# Altium PCB lixie.pcbdoc
Units mil, origin at the board's own origin, x right, y up, seen from the top; angles counter-clockwise.
Board outline 3503.15 x 3276.88 mil, 2 copper layers (Top Layer, Bottom Layer); 61 components, 81 nets, 215 pads, 41 vias.
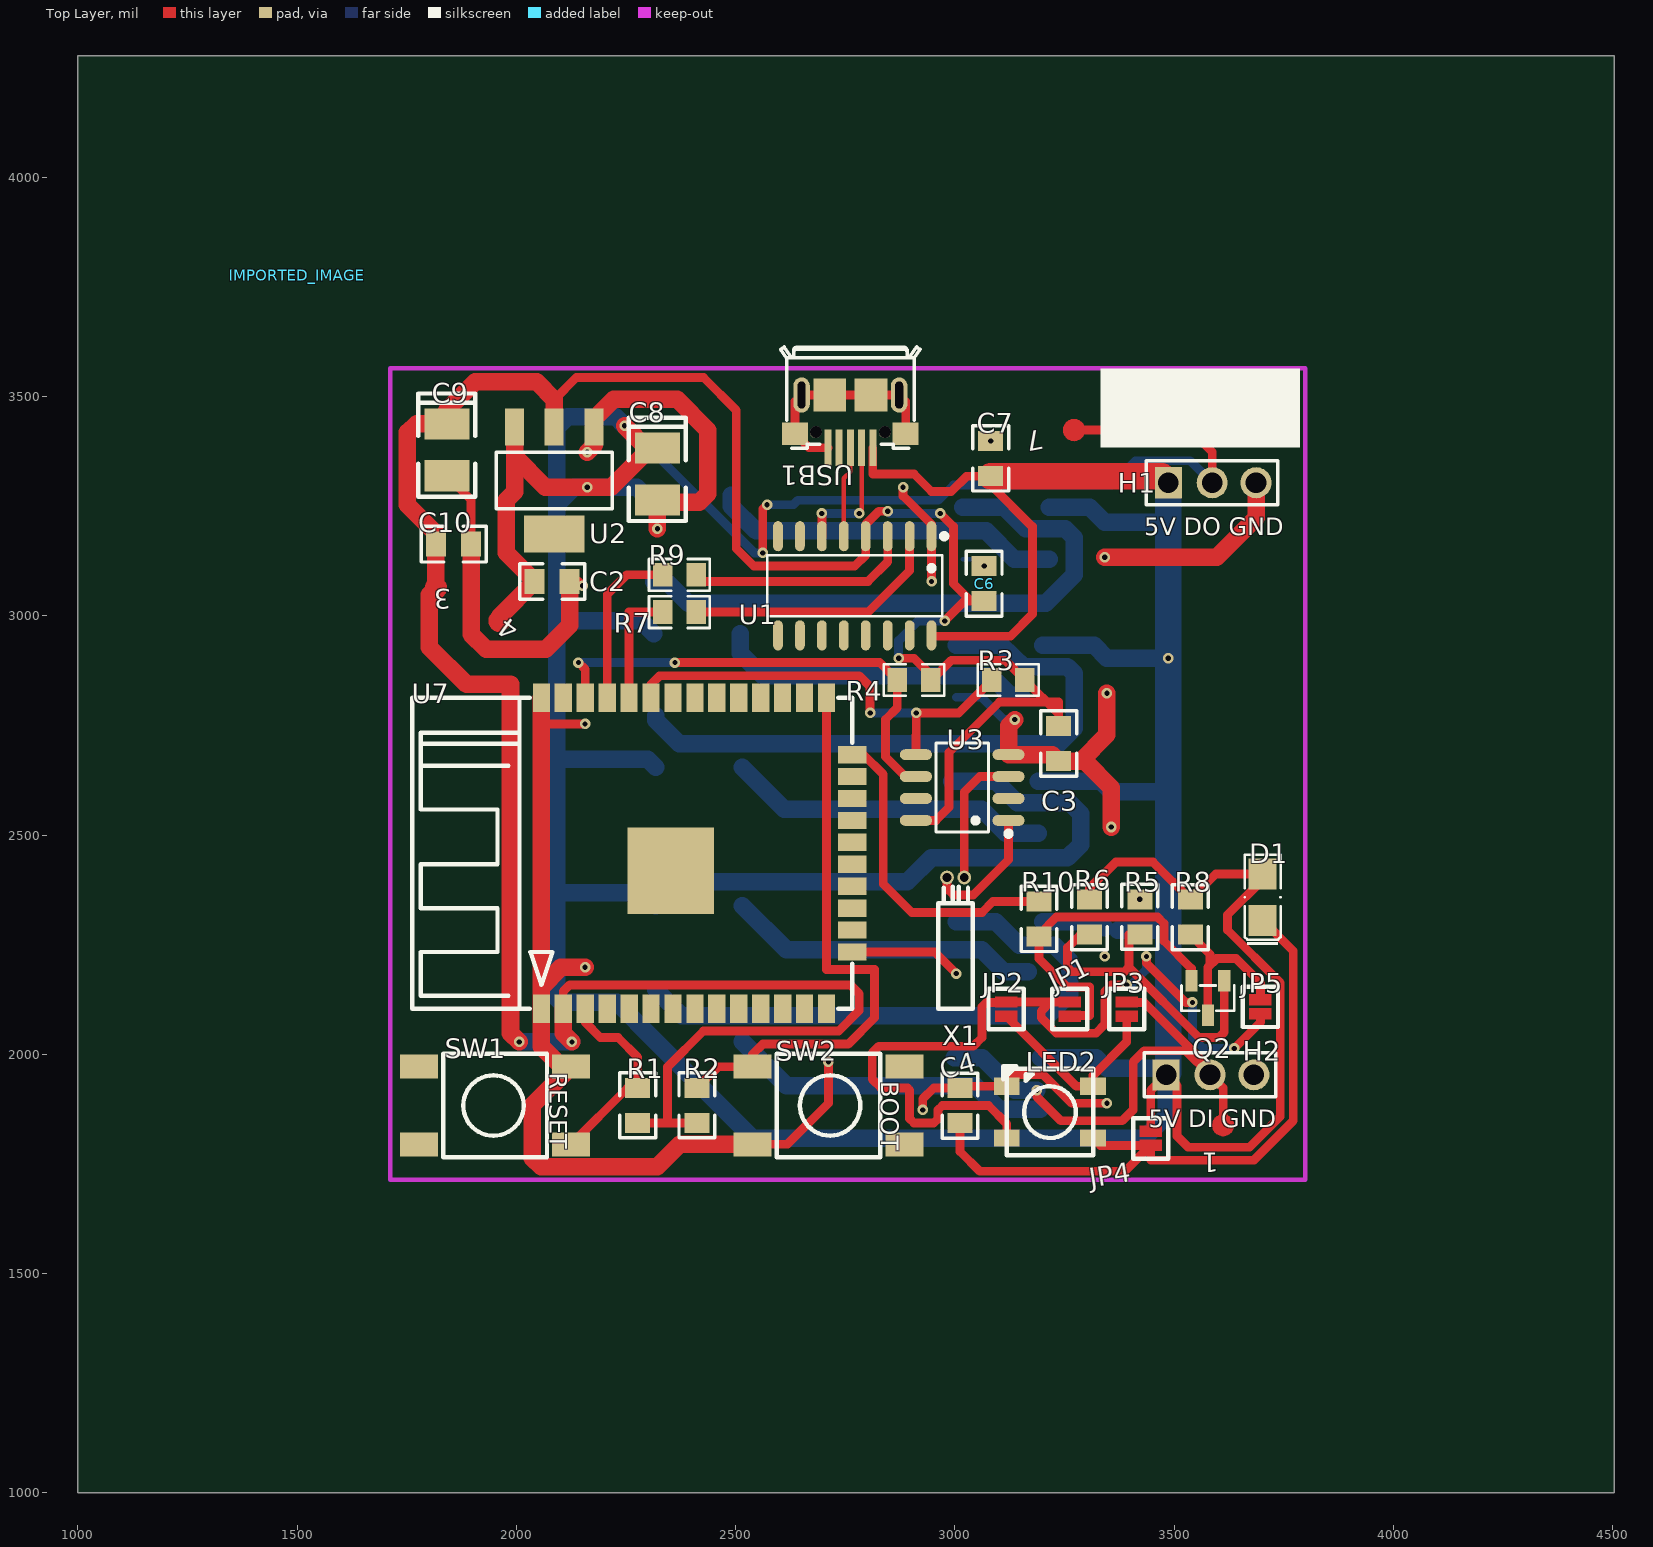
[diagram p0: Top Layer view]
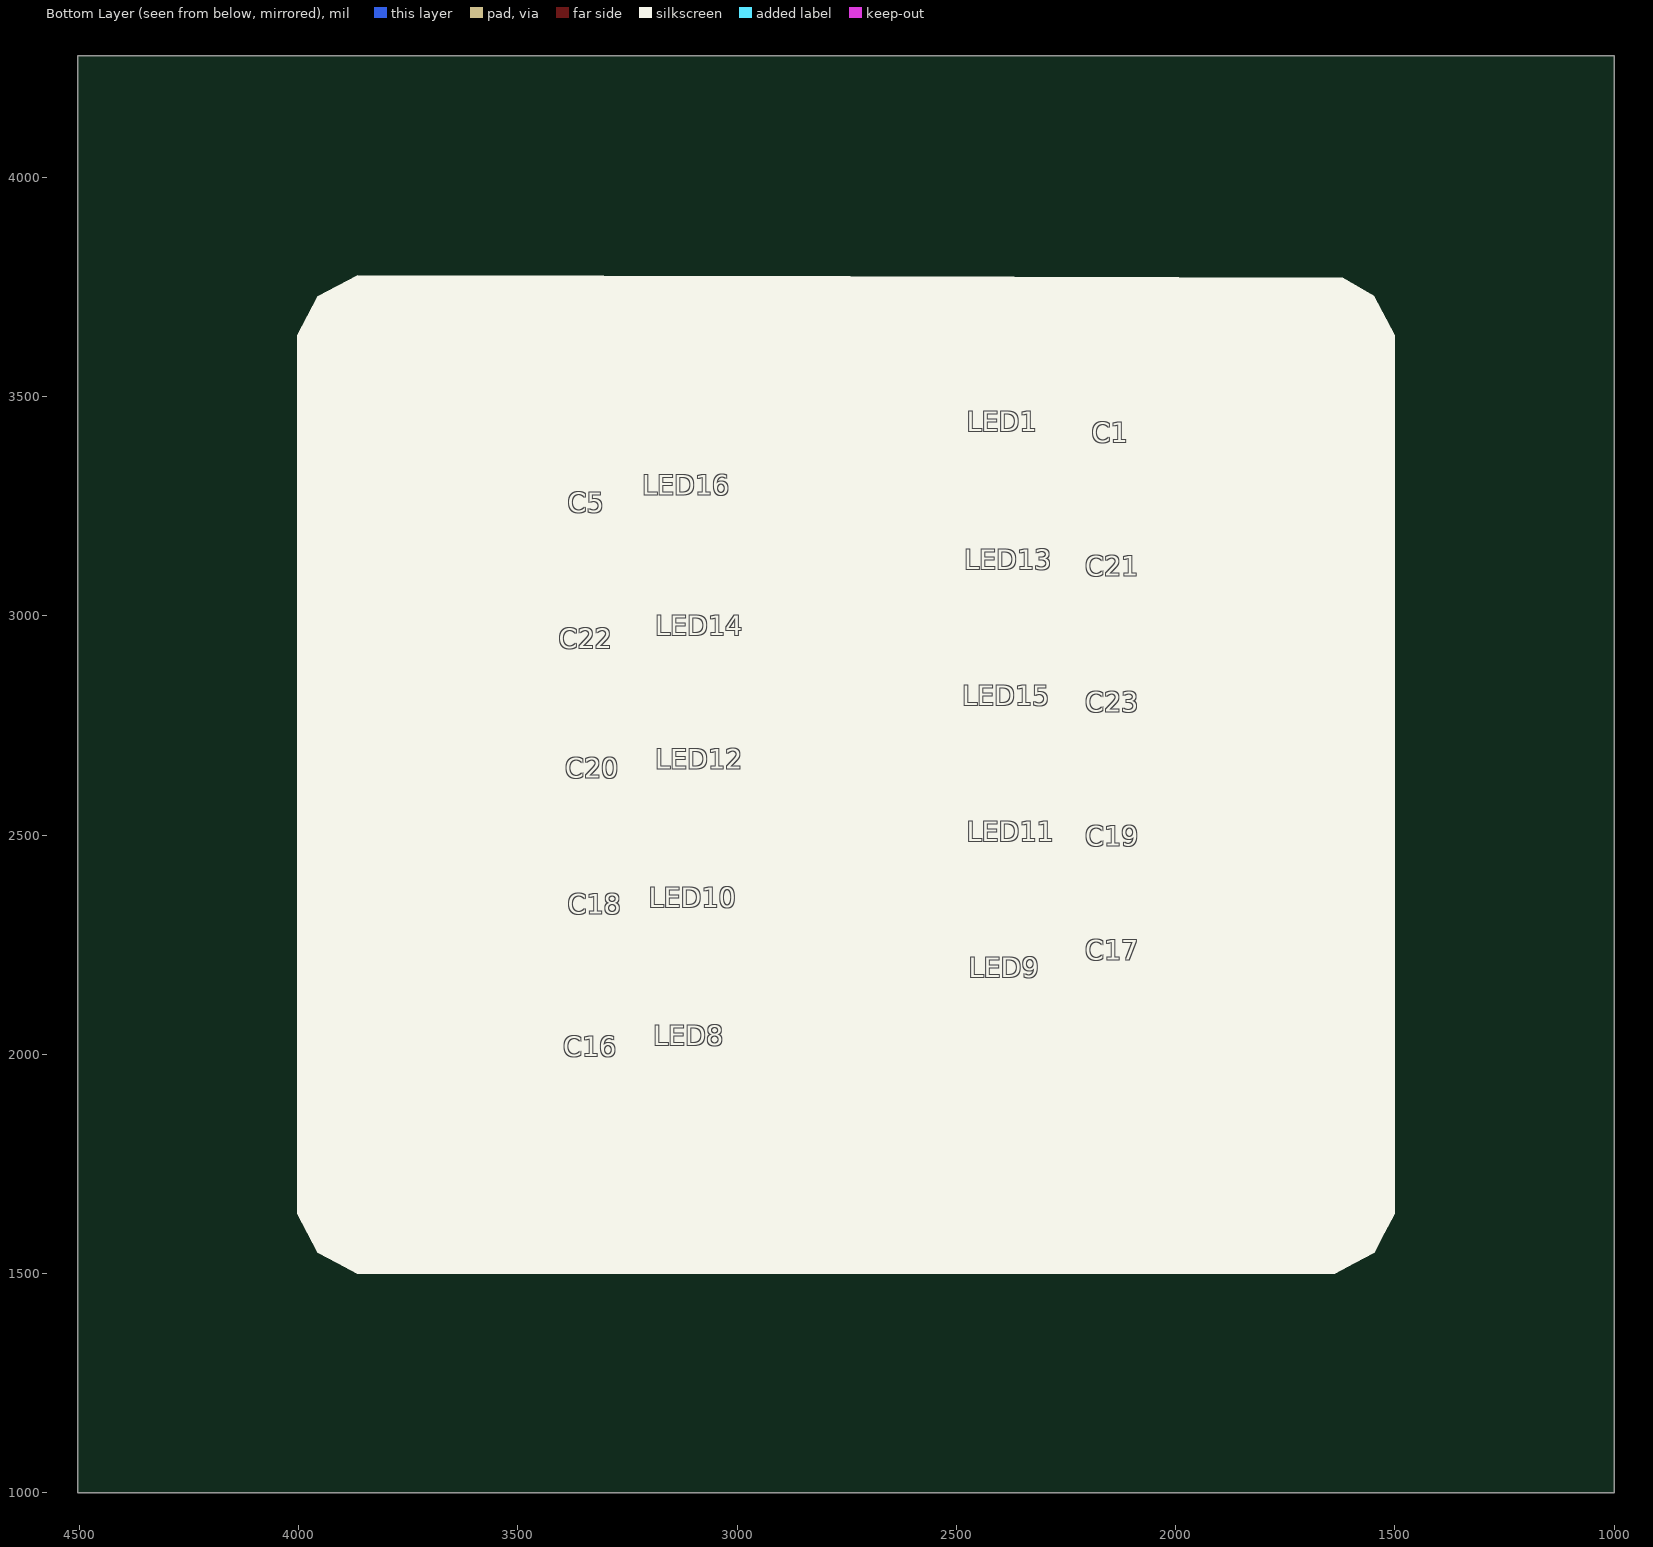
[diagram p1: Bottom Layer view, seen from below]

## Layer stack, top to bottom
Top Layer: signal copper (thickness not stored)
Dielectric: dielectric 12.6, FR-4, Dk 4.8
Bottom Layer: signal copper (thickness not stored)

## Board outline
4503.15,1000 1000,1000 1000,4276.88 4503.15,4276.88

## Components (designator, comment, footprint, x,y, rotation, side; value= is the part's Value field where it differs from the comment)
1 "TESTPAD" TESTPAD 3611.57,1838.44 r0 top
3 "TESTPAD" TESTPAD 1816.57,3063.44 r0 top
4 "TESTPAD" TESTPAD 1961.57,2988.44 r0 top
7 "TESTPAD" TESTPAD 3271.57,3423.44 r0 top
C1 "100nF" 0805#1 2161.57,3333.44 r270 bottom
C2 "100nF" 0805#2 2081.57,3078.44 r180 top
C3 "100nF" 0805#2 3236.57,2708.44 r270 top
C4 "100nF" 0805#2 3011.57,1883.44 r90 top
C5 "100nF" 0805#1 3341.57,3173.44 r90 bottom
C6 "100nF" 0805#2 3066.57,3073.44 r90 top
C7 "100nF" 0805#2 3081.57,3358.44 r270 top
C8 "100uF" CAP-SMD_L3.5-W2.8 2321.57,3323.44 r270 top
C9 "100uF" CAP-SMD_L3.5-W2.8 1841.57,3378.44 r270 top
C10 "100nF" 0805#2 1856.57,3163.44 r180 top
C16 "100nF" 0805#1 3346.57,1928.44 r90 bottom
C17 "100nF" 0805#1 2156.57,2158.44 r270 bottom
C18 "100nF" 0805#1 3341.57,2248.44 r90 bottom
C19 "100nF" 0805#1 2156.57,2408.44 r270 bottom
C20 "100nF" 0805#1 3356.57,2558.44 r90 bottom
C21 "100nF" 0805#1 2151.57,3028.44 r270 bottom
C22 "100nF" 0805#1 3346.57,2863.44 r90 bottom
C23 "100nF" 0805#1 2156.57,2713.44 r270 bottom
D1 "CD4148WP" D1206-RD 3701.57,2358.44 r90 top
H1 "Header-Male-2.54_1x3" HDR-TH_3P-P2.54-V-M-1 3586.57,3303.44 r0 top
H2 "Header-Male-2.54_1x3" HDR-TH_3P-P2.54-V-M-1 3581.57,1953.44 r0 top
IMPORTED_IMAGE "IMPORTED_IMAGE" IMPORTED_IMAGE 1500,3776.88 r0 top
JP1 "JUMPER-SMT_2" JUMPERS_SMT-JUMPER_2_NC_PASTE_NO-SILK 3261.57,2103.44 r90 top
JP2 "JUMPER-SMT_2" JUMPERS_SMT-JUMPER_2_NC_PASTE_NO-SILK 3116.57,2103.44 r90 top
JP3 "JUMPER-SMT_2" JUMPERS_SMT-JUMPER_2_NC_PASTE_NO-SILK 3391.57,2103.44 r270 top
JP4 "JUMPER-SMT_2" JUMPERS_SMT-JUMPER_2_NC_PASTE_NO-SILK 3446.57,1808.44 r270 top
JP5 "JUMPER-SMT_2" JUMPERS_SMT-JUMPER_2_NC_PASTE_NO-SILK 3696.57,2108.44 r270 top
LED1 "WS2812B-B" LED-5050_4P#1 2391.57,3333.44 r0 bottom
LED2 "WS2812B-B" LED-5050_4P#2 3216.57,1868.44 r0 top
LED8 "WS2812B-B" LED-5050_4P#1 3096.57,1933.44 r180 bottom
LED9 "WS2812B-B" LED-5050_4P#1 2416.57,2088.44 r0 bottom
LED10 "WS2812B-B" LED-5050_4P#1 3101.57,2243.44 r180 bottom
LED11 "WS2812B-B" LED-5050_4P#1 2416.57,2398.44 r0 bottom
LED12 "WS2812B-B" LED-5050_4P#1 3091.57,2563.44 r180 bottom
LED13 "WS2812B-B" LED-5050_4P#1 2411.57,3018.44 r0 bottom
LED14 "WS2812B-B" LED-5050_4P#1 3101.57,2873.44 r180 bottom
LED15 "WS2812B-B" LED-5050_4P#1 2416.57,2713.44 r0 bottom
LED16 "WS2812B-B" LED-5050_4P#1 3116.57,3188.44 r180 bottom
Q2 "LBC817-40LT1G" SOT-23-3_L2.9-W1.3-P1.90-LS2.4-BR 3576.57,2128.44 r90 top
R1 "10K" 0805#2 2276.57,1883.44 r270 top
R2 "10K" 0805#2 2411.57,1883.44 r270 top
R3 "4.7K" R0805 3121.57,2853.44 r180 top
R4 "4.7K" R0805 2906.57,2853.44 r180 top
R5 "10K" 0805#2 3421.57,2313.44 r270 top
R6 "22K" 0805#2 3306.57,2313.44 r90 top
R7 "1K" R0805 2371.57,3008.44 r0 top
R8 "1K" 0805#2 3536.57,2313.44 r90 top
R9 "1K" R0805 2371.57,3093.44 r0 top
R10 "50" 0805#2 3191.57,2308.44 r270 top
SW1 "SMD Tactile Switch6*6*6mm" SW-SMD_4PIN-L6.00-W6.00 1951.57,1883.44 r180 top
SW2 "SMD Tactile Switch6*6*6mm" SW-SMD_4PIN-L6.00-W6.00 2711.57,1883.44 r0 top
U1 "CH340C" SOP-16_L10.0-W3.9-P1.27-LS6.0-BL 2771.57,3068.44 r180 top
U2 "AMS1117-3.3" SOT-223_L6.5-W3.5-P2.30-LS7.0-BR 2086.57,3308.44 r90 top
U3 "DS1307M/TR" SOP-8_L4.9-W3.9-P1.27-LS6.0-BL 3016.57,2608.44 r90 top
U7 "ESP-32S" WIFIM-SMD_ESP-32S 2411.57,2458.44 r0 top
USB1 "USB-CON-MICRO-B-5S" MICRO-USB-SMD_MICRO-5P5.9 2761.57,3443.44 r180 top
X1 "CFV206-60.003KDZF" OSC-TH_BD2.0-P0.70-D0.3 3001.57,2403.44 r90 top

## Footprints (in the part's own frame and the unit in brackets; to place one, negate y for a bottom-side part, rotate by r counter-clockwise, add the part's x,y. Pads: shape width x height; smd on the part's side, far side on the other; paste and mask are expansions set on the pad)
0805#1 [mm]
  rect 1.16x1.45 smd: 1(1.016,0) 2(-1.016,0)
  silkscreen extent -1.87,-1.04 1.9,1.03
0805#2 [mm]
  rect 1.16x1.45 smd: 1(-1.016,0) 2(1.016,0)
  silkscreen extent -1.9,-1.03 1.87,1.04
CAP-SMD_L3.5-W2.8 [mm]
  rect 1.8x2.6 smd: 1(-1.501,0) 2(1.501,0)
  silkscreen extent -3.26,-1.65 2.73,1.65
D1206-RD [mm]
  rect 1.785x1.62 smd: 1(-1.343,0) 2(1.342,0)
  silkscreen extent -2.77,-1.08 2.46,1.08
HDR-TH_3P-P2.54-V-M-1 [mm]
  rect 1.575x1.8 hole 1.2: 1(-2.54,0)
  round 1.8 hole 1.2: 2(0,0) 3(2.54,0)
  silkscreen extent -3.81,-1.27 3.81,1.27
IMPORTED_IMAGE [mil]
JUMPERS_SMT-JUMPER_2_NC_PASTE_NO-SILK [mil]
  round 0 smd: 1(-16,0) 2(16,0)
  Top Layer region: -28.5,25 -3.5,25 -3.5,-25 -28.5,-25
  Top Layer region: 3.5,25 28.5,25 28.5,-25 3.5,-25
  silkscreen extent -46,-40 46,40
LED-5050_4P#1 [mm]
  rect 1.5x1 smd: 1(-2.5,1.5) 2(-2.5,-1.5) 3(2.5,-1.5) 4(2.5,1.5)
  silkscreen extent -2.5,-2.65 2.7,2.5
LED-5050_4P#2 [mm]
  rect 1.5x1 smd: 1(2.5,-1.5) 2(2.5,1.5) 3(-2.5,1.5) 4(-2.5,-1.5)
  silkscreen extent -2.7,-2.5 2.5,2.65
MICRO-USB-SMD_MICRO-5P5.9 [mm]
  rect 0.4x2.1 smd: 1(-1.3,1.525) 2(-0.65,1.525) 3(0,1.525) 4(0.65,1.525) 5(1.3,1.525)
  oval 0.95x2.05 hole 0.45 slot 1.55 at 90 deg: SH1(-2.824,-1.525) SH4(2.826,-1.525)
  rect 1.5x1.3 smd: SH2(-3.2,0.725) SH5(3.2,0.725)
  rect 1.9x1.9 smd: SH3(-1.2,-1.525) SH6(1.2,-1.525)
  round 0.7 hole 0.7 unplated: ""(-2,0.625) ""(2,0.625)
  silkscreen extent -4.04,-4.31 4.04,1.57
OSC-TH_BD2.0-P0.70-D0.3 [mm]
  round 0.8 hole 0.5: 1(0,0.5) 2(0,-0.5)
  silkscreen extent -7.6,-1 -0.54,1
R0805 [mil]
  rect 44.59x54.21 smd: 1(-38.04,0) 2(38.04,0)
  silkscreen extent -69,-36 69,36
SOP-8_L4.9-W3.9-P1.27-LS6.0-BL [mm]
  oval 0.63x1.865 smd: 1(-1.905,-2.682) 2(-0.635,-2.682) 3(0.635,-2.682) 4(1.905,-2.682) 5(1.905,2.682) 6(0.635,2.682) 7(-0.635,2.682) 8(-1.905,2.682)
  silkscreen extent -2.82,-2.83 2.58,1.52
SOP-16_L10.0-W3.9-P1.27-LS6.0-BL [mm]
  oval 0.56x1.745 smd: 1(-4.445,-2.873) 2(-3.175,-2.873) 3(-1.905,-2.873) 4(-0.635,-2.873) 5(0.635,-2.873) 6(1.905,-2.873) 7(3.175,-2.873) 8(4.445,-2.873) 9(4.445,2.873) 10(3.175,2.873) 11(1.905,2.873) 12(0.635,2.873) 13(-0.635,2.873) 14(-1.905,2.873) 15(-3.175,2.873) 16(-4.445,2.873)
  silkscreen extent -5.33,-3.02 5.08,1.77
SOT-23-3_L2.9-W1.3-P1.90-LS2.4-BR [mm]
  rect 1.25x0.7 smd: 1(1,-0.95) 2(1,0.95) 3(-1,0)
  silkscreen extent -0.73,-1.53 0.73,1.53
SOT-223_L6.5-W3.5-P2.30-LS7.0-BR [mil]
  rect 85x43 smd: 1(122,-90.5) 2(122,0.5) 3(122,90.5)
  rect 85x138 smd: 4(-122,0.5)
  silkscreen extent -64,-132 64,132
SW-SMD_4PIN-L6.00-W6.00 [mm]
  rect 2.2x1.4 smd: 1(-4.4,2.25) 2(4.4,2.25) 3(-4.4,-2.25) 4(4.4,-2.25)
  silkscreen extent -3,-3 3,3
TESTPAD [mil]
  round 0 smd: TP(0,0)
  Top Layer region: -25,0 -24.82,3.01 -24.27,5.98 -23.38,8.87 -22.14,11.62 -20.57,14.2 -18.71,16.58 -16.58,18.71 -14.2,20.57 -11.62,22.14 -8.87,23.38 -5.98,24.27 -3.01,24.82 0,25 0,25 3.01,24.82 5.98,24.27 8.87,23.38 11.62,22.14 14.2,20.57 16.58,18.71 18.71,16.58 20.57,14.2 22.14,11.62 23.38,8.87 24.27,5.98 24.82,3.01 25,0 25,0 24.82,-3.01 24.27,-5.98 23.38,-8.87 22.14,-11.62 20.57,-14.2 18.71,-16.58 16.58,-18.71 14.2,-20.57 11.62,-22.14 8.87,-23.38 5.98,-24.27 3.01,-24.82 0,-25 0,-25 -3.01,-24.82 -5.98,-24.27 -8.87,-23.38 -11.62,-22.14 -14.2,-20.57 -16.58,-18.71 -18.71,-16.58 -20.57,-14.2 -22.14,-11.62 -23.38,-8.87 -24.27,-5.98 -24.82,-3.01
WIFIM-SMD_ESP-32S [mm]
  rect 1x1.65 smd: 1(-9.005,-9) 2(-7.735,-9) 3(-6.465,-9) 4(-5.195,-9) 5(-3.925,-9) 6(-2.655,-9) 7(-1.385,-9) 8(-0.115,-9) 9(1.155,-9) 10(2.425,-9) 11(3.695,-9) 12(4.965,-9) 13(6.235,-9) 14(7.505,-9) 25(7.505,9) 26(6.235,9) 27(4.965,9) 28(3.695,9) 29(2.425,9) 30(1.155,9) 31(-0.115,9) 32(-1.385,9) 33(-2.655,9) 34(-3.925,9) 35(-5.195,9) 36(-6.465,9) 37(-7.735,9) 38(-9.005,9)
  rect 1.65x1 smd: 15(9.005,-5.715) 16(9.005,-4.445) 17(9.005,-3.175) 18(9.005,-1.905) 19(9.005,-0.635) 20(9.005,0.635) 21(9.005,1.905) 22(9.005,3.175) 23(9.005,4.445) 24(9.005,5.715)
  rect 5x5 smd: 39(-1.51,-1)
  silkscreen extent -16.5,-9 9,9

## Via types
v1: diameter 24, hole 12, Top Layer to Bottom Layer, tented both sides, 41 vias

## Nets (pads, with @x,y where several pads share a name; then routed paths per layer and width w, separated by ;. In a path a pad name is that pad's centre, name@x,y a point inside that pad or via, vN(x,y) a via of type N, cw(c..) or ccw(c..) an arc to the next point about the centre after c; other vN are vias at no path point)
7_TP: 7.TP H1.2 LED1.2 | length 1968.6
  Top Layer w20: v1(2561.57,3143.44) 2561.57,3243.44 v1(2571.57,3253.44) ; 7.TP 3536.57,3423.44 3586.57,3373.44 H1.2
  Bottom Layer w20: LED1.2@2293.17,3392.54 2542.17,3143.44 v1(2561.57,3143.44) ; v1(2571.57,3253.44) 2631.57,3253.44 2641.57,3263.44 2961.57,3263.44 2996.57,3298.44 3356.57,3298.44 3411.57,3353.44 3536.57,3353.44 H1.2
+5V: 4.TP C1.1 C2.2 C5.1 C7.2 C8.1 C16.1 C17.1 C18.1 C19.1 C20.1 C21.1 C22.1 C23.1 D1.2 H1.1 H2.1 JP4.1 LED1.1 LED8.1 LED9.1 LED10.1 LED11.1 LED12.1 LED13.1 LED14.1 LED15.1 LED16.1 R6.2 R8.2 U1.16 U2.3 USB1.1 | length 10951
  Top Layer w20: USB1.1 2812.77,3323.44 2906.57,3323.44 2946.57,3283.44 2991.57,3283.44 3026.57,3318.44 C7.2 3081.57,3298.44 3176.57,3203.44 3176.57,3003.44 3126.57,2953.44 2948.48,2953.44 U1.16@2946.57,2955.35 ; R6.2 3306.57,2378.44 3366.57,2438.44 3451.57,2438.44 R8.2 3594.42,2411.29 D1.2 ; JP4.1 3446.57,1918.44 H2.1 3506.57,1928.44 3506.57,1813.44 3531.57,1788.44 3671.57,1788.44 3741.57,1858.44 3741.57,2163.44 3621.57,2283.44 3621.57,2318.44 3701.57,2398.44 D1.2@3701.57,2411.24
  Top Layer w40: 4.TP 1961.57,2998.44 C2.2 1976.57,3143.44 1976.57,3263.44 1996.07,3282.94 U2.3 ; 1996.07,3363.34 2065.97,3293.44 2216.57,3293.44 2305.67,3382.54 C8.1 2297.47,3382.54 v1(2246.57,3433.44)
  Top Layer w60: C7.2 3471.57,3318.44 H1.1
  Bottom Layer w40: 2091.57,2368.44 C19.1 2289.1,2368.44 LED11.1@2318.15,2339.39 ; 2091.57,2673.44 C23.1 2299.1,2673.44 LED15.1@2318.15,2654.39 ; 2091.57,2970.88 2109.14,2988.44 C21.1 2284.1,2988.44 LED13.1@2313.15,2959.39 ; v1(2246.57,3433.44) 2226.57,3453.44 2116.57,3453.44 2091.57,3428.44 2091.57,3253.44 ; LED1.1@2293.15,3274.39 2274.1,3293.44 v1(2161.57,3293.44) 2131.57,3293.44 2091.57,3253.44 ; LED12.1 3332.52,2622.49 C20.1 3486.57,2598.44 ; LED8.1 3322.52,1992.49 C16.1 3466.57,1968.44 H2.1 3481.57,1858.44 3431.57,1808.44 2539.1,1808.44 2318.15,2029.39 2229.1,2118.44 C17.1 2111.57,2118.44 2106.57,2113.44 2091.57,2128.44 2091.57,3253.44 ; LED10.1 3327.52,2302.49 C18.1 ; LED14.1 3317.52,2932.49 C22.1 v1(3486.57,2903.44) ; LED16.1 3307.52,3247.49 C5.1 3486.57,3213.44 ; 3371.57,2283.44 3475.67,2283.44 3486.57,2294.34
  Bottom Layer w60: H2.1 3486.57,1958.44 H1.1
GND: C1.2 C2.1 C3.2 C4.2 C5.2 C6.2 C7.1 C8.2 C9.2 C10.1 C16.2 C17.2 C18.2 C19.2 C20.2 C21.2 C22.2 C23.2 H1.3 H2.3 LED1.3 LED2.3 LED8.3 LED9.3 LED10.3 LED11.3 LED12.3 LED13.3 LED14.3 LED15.3 LED16.3 R5.1 SW1.3 SW2.3 U1.1 U2.1 U3.4 U7.1 U7.15 U7.38 USB1.5 USB1.SH1 USB1.SH2 USB1.SH3 USB1.SH4 USB1.SH5 USB1.SH6 | length 6640
  Top Layer w20: C9.2 1896.57,3264.34 C10.1 ; U7.38@2057.07,2812.74 2057.07,2768.94 2071.57,2753.44 v1(2156.57,2753.44) ; C2.1 2141.57,3078.44 v1(2151.57,3068.44) ; SW2.3 2617.99,1794.86 2711.57,1888.44 v1(2711.57,1983.44) ; USB1.5 2667.08,3383.39 USB1.SH5 2635.57,3488.7 2650.35,3503.48 USB1.SH6 USB1.SH3 USB1.SH1 2887.57,3488.7 USB1.SH2 ; U7.15 2954.1,2233.44 v1(3003.15,2184.39) ; v1(2881.57,3293.44) 2881.57,3273.44 2946.57,3208.44 U1.1 v1(2946.57,3078.44) ; v1(2926.57,1873.44) 2926.57,1898.44 2951.57,1923.44 C4.2 3015.62,1927.49 3118.15,1927.49 3121.57,1953.44 3201.57,1953.44 3266.57,1888.44 v1(3346.57,1888.44)
  Top Layer w40: C10.1 1896.57,2958.44 1931.57,2923.44 2066.57,2923.44 2121.57,2978.44 C2.1 ; U7.1 U7.38@2057.05,2812.77 ; SW1.3 2102.97,1972.04 2057.07,2017.94 U7.1 2057.07,2152.94 2101.57,2198.44 v1(2156.57,2198.44) ; SW1.3 2036.57,1883.79 2036.57,1763.44 2056.57,1743.44 2321.57,1743.44 2372.99,1794.86 SW2.3 ; v1(2161.57,3373.44) 2177.07,3388.94 U2.1 2177.07,3448.94 2221.57,3493.44 2366.57,3493.44 2436.57,3423.44 2436.57,3278.44 2416.57,3258.44 2321.57,3258.44 C8.2 v1(2321.57,3198.44) ; U3.4 3122.17,2749.04 v1(3136.57,2763.44) ; U3.4 3221.57,2683.44 C3.2 ; v1(3341.57,3133.44) 3596.57,3133.44 3686.57,3223.44 H1.3 ; v1(3346.57,2823.44) 3346.57,2728.44 3286.57,2668.44 C3.2 ; v1(3356.57,2518.44) 3356.57,2608.44 3296.57,2668.44 C3.2
  Bottom Layer w10: LED16.3@3018.15,3129.39 3050.62,3129.39 v1(3066.57,3113.44)
  Bottom Layer w20: LED14.3@3003.17,2814.34 3061.57,2813.44 3111.57,2763.44 v1(3136.57,2763.44)
  other v1: 3341.57,2223.44 3421.57,2353.44 3081.57,3398.44
JP1_2: JP1.2
LED2_1: C4.1 D1.1 JP4.2 LED2.1 | length 1564.1
  Top Layer w20: C4.1 3011.57,1778.44 3056.57,1733.44 3387.57,1733.44 JP4.2 ; LED2.1 3331.95,1792.44 JP4.2 ; D1.1 3771.57,2235.58 3771.57,1848.44 3681.57,1758.44 3446.57,1758.44 JP4.2
LED2_2: JP2.1 JP3.2 LED2.2 | length 456.3
  Top Layer w20: JP2.1 3276.52,1927.49 LED2.2 ; LED2.2 3314.97,1951.84 3391.57,2028.44 JP3.2
LED2_4: JP2.2 JP5.2 LED2.4 | length 1986.9
  Top Layer w20: LED2.4@3118.17,1809.34 3118.17,1841.84 3076.57,1883.44 2971.57,1883.44 2961.57,1873.64 2961.57,1853.44 2951.57,1843.44 2906.57,1843.44 2896.57,1853.44 2896.57,1918.44 2891.57,1923.44 2831.57,1923.44 2811.57,1943.44 2811.57,2003.44 2826.57,2018.44 3041.57,2018.44 3061.57,2038.44 3061.57,2108.44 3071.57,2118.44 3115.57,2118.44 JP2.2 3261.57,2119.44 3217.57,2119.44 3196.57,2098.44 3196.57,2083.44 3231.57,2048.44 3321.57,2048.44 3341.57,2068.44 3341.57,2143.44 3356.57,2158.44 v1(3391.57,2158.44) ; v1(3436.57,2223.44) 3436.57,2208.44 3526.57,2118.44 v1(3541.57,2118.44) ; v1(3636.57,2013.44) 3696.57,2073.44 JP5.2
  Bottom Layer w20: v1(3391.57,2158.44) 3401.57,2158.44 3436.57,2193.44 v1(3436.57,2223.44) ; v1(3541.57,2118.44) 3541.57,2038.44 3566.57,2013.44 v1(3636.57,2013.44)
LED8_4: 1.TP H2.2 JP3.1 LED8.4 | length 1200.3
  Top Layer w20: v1(3186.57,1918.44) 3186.57,1903.44 3241.57,1848.44 3381.57,1848.44 3406.57,1873.44 3406.57,1983.44 3431.57,2008.44 3526.57,2008.44 H2.2 ; JP3.1 3392.57,2118.44 3431.57,2118.44 3581.57,1968.44 H2.2 ; 1.TP 3611.57,1923.44 H2.2
  Bottom Layer w40: LED8.4@2998.16,1992.49 3062.53,1992.49 3136.58,1918.44 v1(3186.57,1918.44)
LED9_4: LED8.2 LED9.4 | length 744.2
  Bottom Layer w40: LED9.4 2615.95,1928.44 3046.57,1928.44 3100.62,1874.39 LED8.2
LED10_4: LED9.2 LED10.4 | length 1358.9
  Bottom Layer w40: LED9.2@2318.15,2147.49 2377.2,2088.44 3211.57,2088.44 3261.57,2138.44 3261.57,2213.44 3226.57,2248.44 3146.57,2248.44 3092.52,2302.49 LED10.4
LED11_4: LED10.2 LED11.4 | length 714.1
  Bottom Layer w40: LED11.4@2514.97,2339.34 2615.87,2238.44 3061.57,2238.44 3111.57,2188.44 3166.57,2188.44
LED12_4: LED11.2 LED12.4 | length 1424.3
  Bottom Layer w40: LED11.2@2318.15,2457.49 2382.2,2393.44 2891.57,2393.44 2946.57,2448.44 3256.57,2448.44 3286.57,2478.44 3286.57,2548.44 3261.57,2573.44 3141.57,2573.44 3092.52,2622.49 LED12.4@2993.15,2622.49
LED14_2: LED13.4 LED14.2 | length 725.9
  Bottom Layer w40: LED13.4@2509.97,2959.34 2509.97,2915.04 2561.57,2863.44 3081.57,2863.44 3126.57,2818.44 3151.57,2818.44
LED15_2: LED14.4 LED15.2 | length 1420.1
  Bottom Layer w40: LED15.2@2318.17,2772.54 2318.17,2761.84 2371.57,2708.44 3236.57,2708.44 3271.57,2743.44 3271.57,2868.44 3256.57,2883.44 3156.57,2883.44 3105.57,2932.54 LED14.4@3003.17,2932.54
LED15_4: LED12.2 LED15.4 | length 737.1
  Bottom Layer w40: LED15.4 2610.94,2558.44 3061.57,2558.44 3115.62,2504.39 LED12.2
LED16_2: LED1.4 LED16.2 | length 799.3
  Bottom Layer w40: LED1.4 2489.99,3250.02 2546.57,3193.44 3071.57,3193.44 3135.62,3129.39 LED16.2
LED16_4: LED13.2 LED16.4 | length 1372.7
  Bottom Layer w40: LED13.2@2313.17,3077.54 2342.57,3077.54 2391.57,3028.44 3206.57,3028.44 3271.57,3093.44 3271.57,3178.44 3251.57,3198.44 3161.57,3198.44 3112.57,3247.54 LED16.4@3018.17,3247.54
R5_2: Q2.1 R5.2 R6.1 | length 761.5
  Top Layer w20: R6.1 3286.57,2273.44 3256.57,2243.44 3256.57,2198.44 3266.57,2188.44 3386.57,2188.44 3396.57,2198.44 ; R5.2 3396.57,2273.44 3396.57,2198.44 ; Q2.1 3613.97,2050.84 3601.57,2038.44 3556.57,2038.44 3396.57,2198.44
R8_1: JP5.1 Q2.3 R8.1 | length 388.1
  Top Layer w20: R8.1 3581.57,2228.44 3581.57,2203.44 ; Q2.3 3576.57,2198.44 3596.57,2218.44 3641.57,2218.44 3696.57,2163.44 JP5.1
R10_2: JP1.1 Q2.2 R10.2 | length 771.7
  Top Layer w20: JP1.1 3262.57,2088.44 3306.57,2088.44 3306.57,2153.44 3256.57,2153.44 3191.57,2218.44 R10.2 3191.57,2273.44 3231.57,2313.44 3461.57,2313.44 3476.57,2298.44 3476.57,2258.44 3539.17,2195.84 Q2.2
S$28: 
S$38: 
S$40: 
SW1_1: R1.1 SW1.1 U7.3 | length 458.6
  Top Layer w20: SW1.1 2253.38,1923.44 R1.1 2276.57,1993.44 2231.57,2038.44 2191.57,2038.44 2157.05,2072.96 U7.3
SW1_2: SW1.2
SW1_4: SW1.4
SW2_1: R2.1 SW2.1 U7.25 | length 1326.6
  Top Layer w20: R2.1 2460.15,1972.02 SW2.1 ; SW2.1@2538.37,1972.04 2538.37,2000.24 2561.57,2023.44 2756.57,2023.44 2816.57,2083.44 2816.57,2193.44 2707.07,2193.44 U7.25@2707.07,2812.74
SW2_2: SW2.2
SW2_4: SW2.4
U1_2: R7.2 U1.2 | length 604.4
  Top Layer w20: R7.2 2801.57,3008.44 2896.57,3103.44 U1.2
U1_3: R9.2 U1.3 | length 528.7
  Top Layer w20: R9.2 2409.57,3078.44 2801.57,3078.44 2846.57,3123.44 U1.3
U1_5: U1.5 USB1.3 | length 208.1
  Top Layer w10: U1.5 2746.57,3313.44 2761.57,3328.44 USB1.3
U1_6: U1.6 USB1.2 | length 289.2
  Top Layer w10: v1(2781.57,3233.44) 2787.17,3239.04 USB1.2
  Top Layer w20: U1.6 v1(2696.57,3233.44)
  Bottom Layer w20: v1(2696.57,3233.44) v1(2781.57,3233.44)
U1_7: U1.7
U1_8: U1.8
U1_9: U1.9
U1_10: U1.10
U1_11: U1.11
U1_12: U1.12
U1_13: U1.13
U1_14: U1.14
U1_15: U1.15
U2_4: U2.4
U3_1: U3.1 X1.1 | length 294.6
  Top Layer w20: X1.1 2981.57,2378.44 2996.57,2363.44 3041.57,2363.44 3122.17,2444.04 U3.1
U3_2: U3.2
U3_3: U3.3 X1.2 | length 310.2
  Top Layer w20: X1.2 3021.25,2598.12 3056.57,2633.44 U3.3
U3_7: U3.7
U7_4: U7.4
U7_5: U7.5
U7_6: U7.6
U7_7: U7.7
U7_8: U7.8
U7_9: U7.9
U7_10: U7.10
U7_11: U7.11
U7_12: U7.12
U7_13: U7.13
U7_14: U7.14
U7_16: U7.16
U7_17: U7.17
U7_18: U7.18
U7_19: U7.19
U7_20: U7.20
U7_21: U7.21
U7_22: U7.22
U7_23: U7.23
U7_24: R10.1 U7.24 | length 731.4
  Top Layer w20: U7.24 2791.57,2683.44 2836.57,2638.44 2836.57,2388.44 2901.57,2323.44 3061.57,2323.44 3086.57,2348.44 R10.1
U7_26: U7.26
U7_27: U7.27
U7_28: U7.28
U7_29: U7.29
U7_30: U7.30
U7_31: U7.31
U7_32: U7.32
U7_33: R3.2 U3.5 U7.33 | length 1012.1
  Top Layer w20: U7.33 2307.04,2843.91 2326.57,2863.44 2781.57,2863.44 2806.57,2838.44 v1(2806.57,2778.44) ; U3.5 v1(2911.57,2778.44) 3008.53,2778.44 R3.2
  Bottom Layer w20: v1(2806.57,2778.44) v1(2911.57,2778.44)
U7_34: R7.1 U7.34 | length 272.8
  Top Layer w20: U7.34@2257.05,2812.77 2257.05,3007.96 2256.57,3008.44 R7.1
U7_35: R9.1 U7.35 | length 381.1
  Top Layer w20: U7.35@2207.05,2812.77 2207.05,3048.92 2251.57,3093.44 R9.1
U7_36: R4.2 U3.6 U7.36 | length 1104.9
  Top Layer w20: v1(2141.57,2893.44) 2157.05,2877.96 U7.36@2157.05,2812.77 ; v1(2361.57,2893.44) 2828.57,2893.44 2868.57,2853.44 2868.57,2790.44 2841.57,2763.44 2841.57,2678.44 2886.57,2633.44 U3.6
  Bottom Layer w20: v1(2141.57,2893.44) v1(2361.57,2893.44)
U7_37: U7.37
USB1_4: USB1.4
VCC: 3.TP C3.1 C6.1 C9.1 C10.2 R1.2 R2.2 R3.1 R4.1 U1.4 U2.2 U3.8 U7.2 | length 6715.4
  Top Layer w20: 2086.07,3492.94 2136.57,3543.44 2426.57,3543.44 2501.57,3468.44 2501.57,3153.44 2541.57,3113.44 2771.57,3113.44 2796.57,3138.44 U1.4 2796.57,3208.44 2826.57,3238.44 v1(2846.57,3238.44) ; U7.2 2107.07,2143.94 2121.57,2158.44 2761.57,2158.44 2781.57,2138.44 2781.57,2100.34 2734.67,2053.44 2426.57,2053.44 2344.87,1971.74 2344.87,1843.44 ; R1.2 R2.2 ; v1(2871.57,2903.44) 2906.57,2903.44 2944.61,2865.4 R4.1 2946.57,2853.44 2991.57,2898.44 3114.61,2898.44 R3.1 3236.57,2776.48 C3.1 3236.57,2803.44 3101.57,2803.44 2986.57,2688.44 2986.57,2563.44 2956.57,2533.44 U3.8 ; v1(2966.57,3233.44) 2996.57,3203.44 2996.57,3073.44 3036.57,3033.44 C6.1 3021.57,3033.44 v1(2976.57,2988.44)
  Top Layer w40: v1(2006.57,2028.44) 1986.57,2048.44 1986.57,2843.44 1886.57,2843.44 1801.57,2928.44 1801.57,3048.44 3.TP C10.2 1816.57,3188.44 1751.57,3253.44 1751.57,3418.44 1772.47,3437.54 C9.1 1841.57,3468.44 1906.57,3533.44 2046.57,3533.44 2086.07,3492.94 U2.2 ; U7.2 2107.05,2047.96 v1(2126.57,2028.44)
  Bottom Layer w20: v1(2846.57,3238.44) 2851.57,3233.44 v1(2966.57,3233.44) ; v1(2871.57,2903.44) 2871.57,2943.44 2916.57,2988.44 v1(2976.57,2988.44)
  Bottom Layer w40: v1(2006.57,2028.44) v1(2126.57,2028.44)
pads on no net: U7.39 USB1.

## Polygon pours and split planes (outlines as drawn)
GND on Bottom Layer (solid): 1711.57,1713.44 1711.57,3563.44 3801.57,3563.44 3801.57,1718.44 3796.57,1713.44

## Silkscreen, mask and mechanical layers (free items; w line width, h text height)
Top Overlay:
  rectangle: 3331.57,3383.44 3786.57,3563.44
  text "5V DO GND" at 3431.57,3183.44 h40
  text "RESET" at 2076.57,1958.44 h40 r270
  text "BOOT" at 2831.57,1938.44 h40 r270
  text "5V DI GND" at 3441.57,1833.44 h40

## Text inside footprints (layer, text, board x,y; h text height)
1: Document "DIN" at 3601.57,1753.76 h39.37
3: Document "3V3" at 1736.57,2968.76 h39.37
4: Document "5V" at 1861.57,2953.76 h39.37
7: Document "DOUT" at 3306.57,3378.76 h39.37